# Altium PCB ControllerBoard.PcbDoc
Units mil, origin at the board's own origin, x right, y up, seen from the top; angles counter-clockwise.
Board outline 1380 x 1960 mil, 2 copper layers (Top Layer, Bottom Layer); 4 components, 9 nets, 32 pads, 0 vias.
Unrouted connection lines stored in the file: 7.
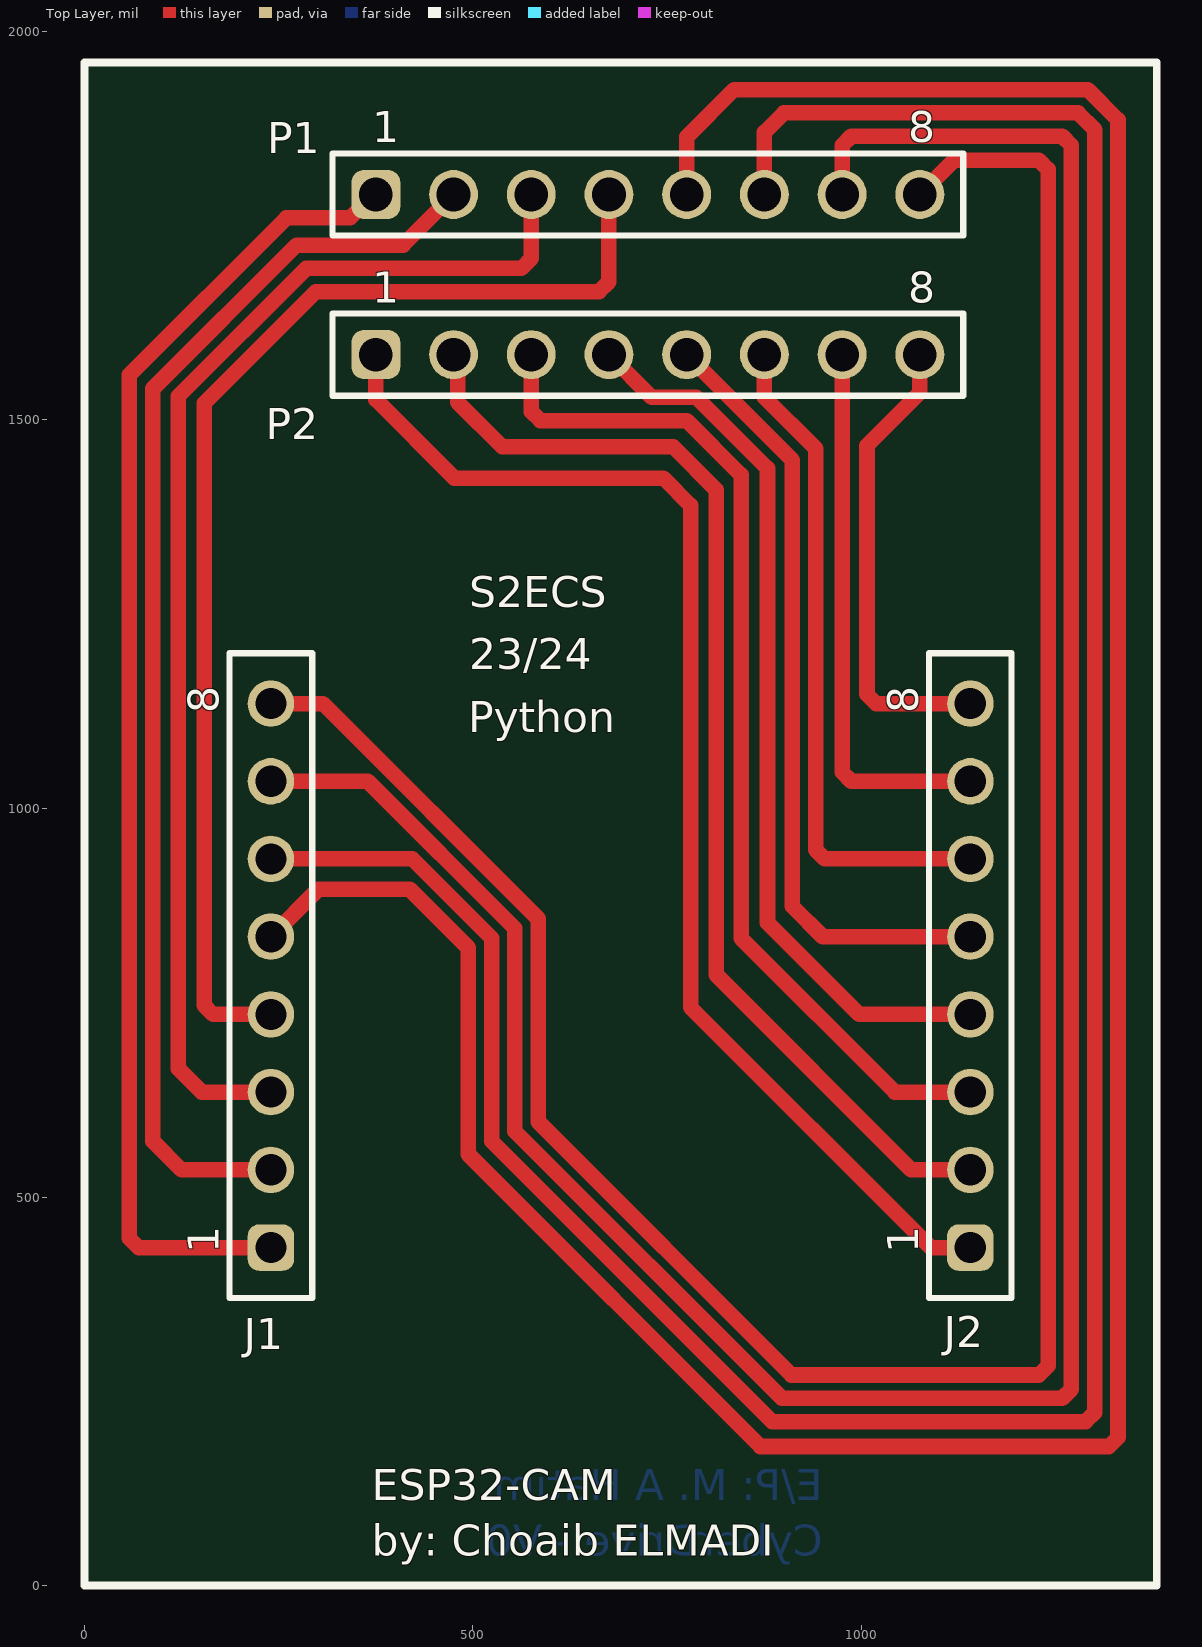
[diagram p0: Top Layer view]
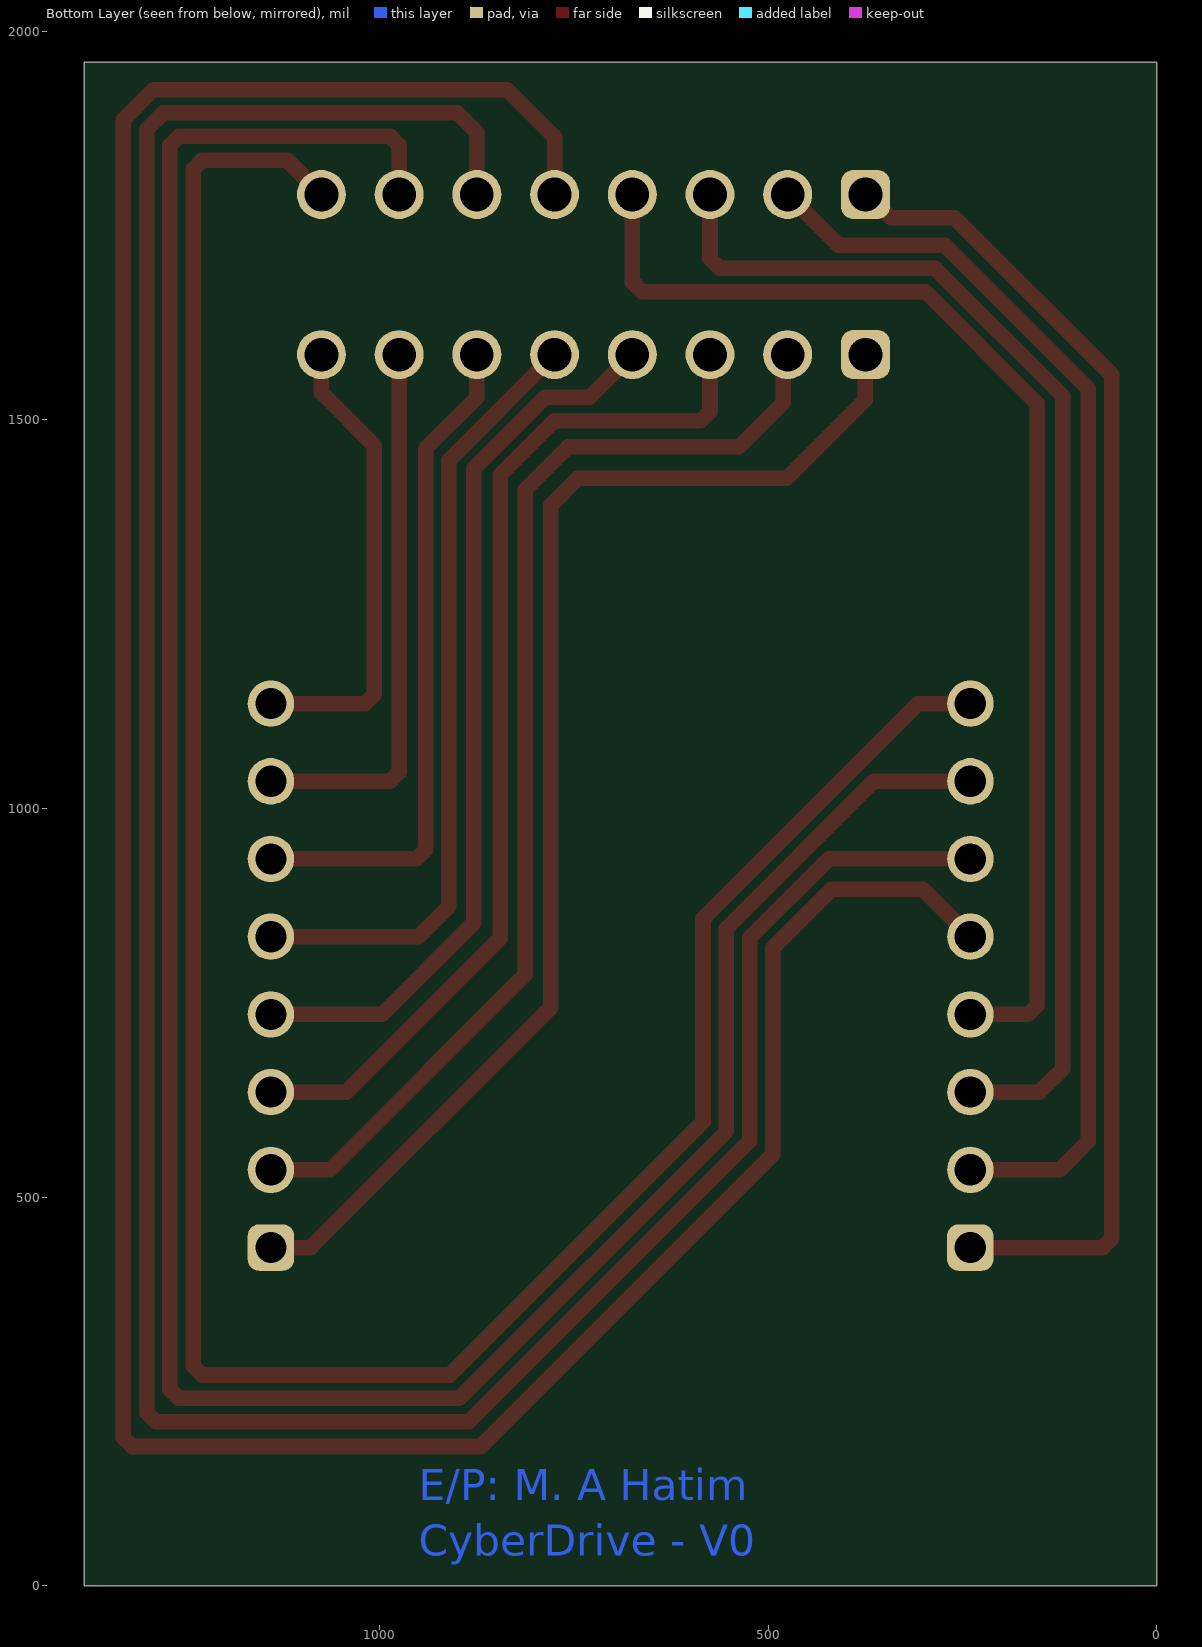
[diagram p1: Bottom Layer view, seen from below]
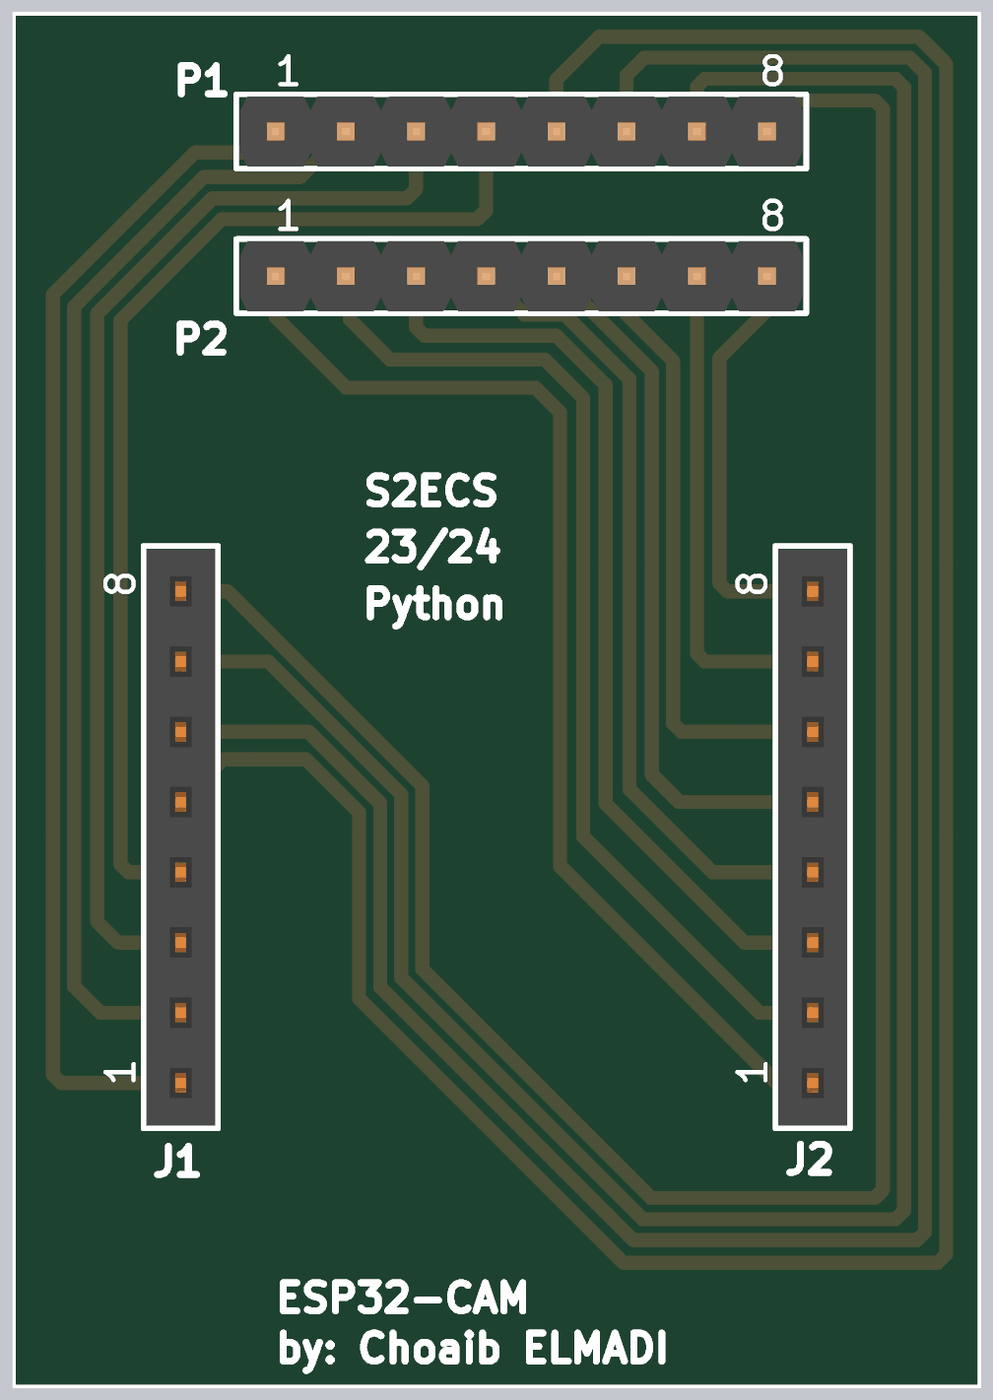
[diagram p2: 3D render of the assembled board from above, using the file's embedded part models]

## Layer stack, top to bottom
Top Solder: solder mask 0.4, Solder Resist, Dk 3.5
Top Layer: signal copper 1.4
Dielectric 1: dielectric 12.6, FR-4, Dk 4.8
Bottom Layer: signal copper 1.4
Bottom Solder: solder mask 0.4, Solder Resist, Dk 3.5

## Board outline
0,0 1380,0 1380,1960 0,1960

## Design rules (kind name [scope] priority, off if disabled: settings)
Clearance [All] p1: gap=10 ignorepadtopadclearanceinfootprint=FALSE ismatrix=TRUE
PolygonConnect [All] p1: connectstyle=Relief reliefconductorwidth=10 reliefentries=4 polygonreliefangle="90 Angle" airgapwidth=10
RoutingVias [All] p1: holewidth=28 width=50 viastyle="Through Hole" minholewidth=28 minwidth=50 maxholewidth=28 maxwidth=50
SolderMaskExpansion [All] p1: expansion=4 istentingtop=FALSE
Width MaxMinWidth [All] p1: maxlimit=30 minlimit=10 preferedwidth=10 minimp=50.000000 maximp=50.000000 favimp=50.000000
Width [All] p2: maxlimit=10 minlimit=10 preferedwidth=10
30 further rules are at their usual default settings.

## Components (designator, comment, footprint, x,y, rotation, side; value= is the part's Value field where it differs from the comment)
J1 "Socket Headers" 61300811821 240,785 r90 top locked
J2 "Socket Headers" 61300811821 1140,785 r90 top locked
P1 "Pin Headers" 61300811121 725,1790 r0 top locked
P2 "Pin Headers" 61300811121 725,1584 r0 top locked

## Footprints (in the part's own frame and the unit in brackets; to place one, negate y for a bottom-side part, rotate by r counter-clockwise, add the part's x,y. Pads: shape width x height; smd on the part's side, far side on the other; paste and mask are expansions set on the pad)
61300811121 [mm] "Pin Header, pitch 2.54 mm, THT, Vertical, single row, 8p"
  rrect50% 1.6x1.6 hole 1.1: 1(-8.89,0)
  round 1.6 hole 1.1: 2(-6.35,0) 3(-3.81,0) 4(-1.27,0) 5(1.27,0) 6(3.81,0) 7(6.35,0) 8(8.89,0)
  silkscreen extent -10.31,-1.35 10.31,1.35, body extent -10.16,-1.27 10.16,1.27, height 8.57
61300811821 [mm] "Socket Header, Pitch 2.54 mm, THT, Vertical, single row, 8p"
  rrect50% 1.52x1.52 hole 1.02: 1(-8.89,0)
  round 1.52 hole 1.02: 2(-6.35,0) 3(-3.81,0) 4(-1.27,0) 5(1.27,0) 6(3.81,0) 7(6.35,0) 8(8.89,0)
  silkscreen extent -10.54,-1.35 10.54,1.35, body extent -10.41,-1.25 10.41,1.25, height 8.55

## Part data
J1 J2: library part CMP-1502-01327-2, Contact Resistance=20mΩ, Current Rating=3A, Operating Supply Voltage=250V, Gender=Female, Lead Pitch=2.54mm, NexarPartId=61924723, Number of Pins=8, Orientation=Vertical, RoHS=Non-Compliant
P1 P2: library part CMP-1502-01076-2, Color=Black, Contact Resistance=20mΩ, Current Rating=3A, Max Operating Temperature=105°C, Min Operating Temperature=-40°C, Operating Supply Voltage=250V, Connector Type="Male Pin", Contact Material=Copper, Contact Mating Length=5.9944mm, Contact Plating=Gold, Gender=Male, Height=8.54mm, Lead Pitch=2.54mm, Mount="Through Hole", NexarPartId=32855533, Number of Contacts=8, Number of Pins=8, Number of Positions=8, Number of Rows=1, Orientation=Vertical, Packaging=Bulk, Pitch=2.54mm, REACH SVHC=Unknown, RoHS=Compliant, Termination=Solder, Voltage Rating=250V

## Nets (pads, with @x,y where several pads share a name; then routed paths per layer and width w, separated by ;. In a path a pad name is that pad's centre, name@x,y a point inside that pad or via, vN(x,y) a via of type N, cw(c..) or ccw(c..) an arc to the next point about the centre after c; other vN are vias at no path point)
NetJ1_1: J1.1 J1.2 J1.3 J1.4 J1.5 J1.6 J1.7 J1.8 P1.1 P1.2 P1.3 P1.4 P1.5 P1.6 P1.7 P1.8 | length 20867.1
  Top Layer w20: J1.1 69.72,435 58,446.72 58,1558 260,1760 341.89,1760 371.89,1790 P1.1 ; J1.2 125,535 88,572 88,1540 273,1725 410,1725 P1.2 ; J1.3 151,635 121,665 121,1530.57 285.43,1695 562.28,1695 575,1707.72 P1.3 ; J1.4 165.72,735 154,746.72 154,1521.15 297.85,1665 662.28,1665 675,1677.72 P1.4 ; J1.5 301,896 418.72,896 494,820.72 494,555 870,179 1318.28,179 1330,190.72 1330,1886 1291,1925 836,1925 775,1864 P1.5 ; J1.6 422.15,935 524,833.15 524,572 885,211 1288.28,211 1300,222.72 1300,1873.57 1278.57,1895 900,1895 875,1870 P1.6 ; J1.7 364.57,1035 554,845.57 554,584.43 897.43,241 1258.28,241 1270,252.72 1270,1853.28 1258.28,1865 986.72,1865 975,1853.28 P1.7 ; J1.8 307,1135 584,858 584,596.85 909.85,271 1228.28,271 1240,282.72 1240,1822.28 1228.28,1834 1119,1834 P1.8
NetJ2_1: J2.1 P2.1 | length 1653.3
  Top Layer w20: P2.1 375,1526 476,1425 745,1425 780,1390 780,744 1089,435 J2.1
NetJ2_2: J2.2 P2.2 | length 1497.8
  Top Layer w20: P2.2 480.5,1578.5 480.5,1522.5 537.86,1465.14 757.86,1465.14 813,1410 813,786 1064,535 J2.2
NetJ2_3: J2.3 P2.3 | length 1350.2
  Top Layer w20: P2.3 575,1510.72 586.72,1499 775.15,1499 845,1429.15 845,833 1043,635 J2.3
NetJ2_4: J2.4 P2.4 | length 1159.1
  Top Layer w20: P2.4 730,1529 787.57,1529 879,1437.57 879,853 997,735 J2.4
NetJ2_5: J2.5 P2.5 | length 1011.5
  Top Layer w20: P2.5 911,1448 911,874 950,835 J2.5
NetJ2_6: J2.6 P2.6 | length 868.5
  Top Layer w20: P2.6 875,1529 941,1463 941,946.72 952.72,935 J2.6
NetJ2_7: J2.7 P2.7 | length 707.1
  Top Layer w20: P2.7 975,1046.72 986.72,1035 J2.7
NetJ2_8: J2.8 P2.8 | length 603.3
  Top Layer w20: P2.8 1075,1535 1007,1467 1007,1146.72 1018.72,1135 J2.8

## Other copper
Bottom Layer:
  text "E/P: M. A Hatim" at 950,110 h40
  text "CyberDrive - V0" at 950,38.33 h40

## Silkscreen, mask and mechanical layers (free items; w line width, h text height)
Top Overlay:
  the board outline again, w10
  text "S2ECS" at 495,1259 h40
  text "23/24" at 495,1178.83 h40
  text "Python" at 494,1098.33 h40
  text "ESP32-CAM" at 370,110 h40
  text "by: Choaib ELMADI" at 370,38.33 h40

## Text inside footprints (layer, text, board x,y; h text height)
J1: Top Overlay "8" at 173.07,1122.8 h40 r90; Top Overlay "1" at 173.07,427.52 h40 r90
J2: Top Overlay "8" at 1073.07,1122.8 h40 r90; Top Overlay "1" at 1073.07,427.52 h40 r90
P1: Top Overlay "1" at 370.28,1856.93 h40; Top Overlay "8" at 1060.04,1856.93 h40
P2: Top Overlay "1" at 370.28,1650.93 h40; Top Overlay "8" at 1060.04,1650.93 h40